# EAGLE board 640 motherboard (EAGLE 6.1)

Size 160 x 117.7 mm. Coordinates in mm from the lower left corner, seen from the top.
Outline: 0,0 160,0 160,117.7 0,117.7 0,0
Outline: 66.65,19.63 109.16,19.63 109.14,66.69 66.62,66.69 66.65,19.63
Copper layers (1*16): Top 0.035mm / dielectric 1.5mm / Bottom 0.035mm
Design rules: minimum track width 10mil, minimum drill 24mil, track to track 8mil, track to pad 8mil, pad to pad 8mil, via to via 8mil, smd to smd 8mil, copper to edge 40mil, drill to drill 8mil, minimum pad ring 10mil, minimum via ring 8mil, stop-mask expansion 4mil, vias tented up to drill 0mil, thermal gap 10mil

## Footprints (pad centres in the part's own frame; a part is rotated, then mirrored left to right if it is on the bottom)
10X10MTA = drill 1.016 long: 1 11.43,0; 2 8.89,0; 3 6.35,0; 4 3.81,0; 5 1.27,0; 6 -1.27,0; 7 -3.81,0; 8 -6.35,0; 9 -8.89,0; 10 -11.43,0
E-050X125 = drill 1.016 pad 2.184: + -2.54,0 | drill 1.016 pad 2.184 octagon: - 2.54,0
C2.5-2 = drill 0.813 pad 1.6 octagon: 1 -1.27,0; 2 1.27,0
DO35-10 = drill 0.813 long: A 5.08,0; C -5.08,0
SFH482 = drill 0.813 long: A -1.27,0; K 1.27,0
TUXGR_16X2_R2 = drill 1 pad 1.676: 1 -32,15.5; 2 -29.46,15.5; 3 -26.92,15.5; 4 -24.38,15.5; 5 -21.84,15.5; 6 -19.3,15.5; 7 -16.76,15.5; 8 -14.22,15.5; 9 -11.68,15.5; 10 -9.14,15.5; 11 -6.6,15.5; 12 -4.06,15.5; 13 -1.52,15.5; 14 1.02,15.5; 15 3.56,15.5; 16 6.1,15.5 | hole 2.5: -37.5,-15.5; 37.5,-15.5; -37.5,15.5; 37.5,15.5
TO3-K02 = drill 1.194 pad 3.81 octagon: 1 -1.778,-5.461; 2 -1.778,5.461 | drill 4.115 pad 6.477: 3 15.113,0; 3@ -15.113,0
1X2MTA = drill 1.676 long: 1 1.981,0; 2 -1.981,0
10X08MTA = drill 1.016 long: 1 8.89,0; 2 6.35,0; 3 3.81,0; 4 1.27,0; 5 -1.27,0; 6 -3.81,0; 7 -6.35,0; 8 -8.89,0
PAK100/2500-10 = drill 1 pad 1.422: 1 -5.08,-1.27; 2 -5.08,1.27; 3 -2.54,-1.27; 4 -2.54,1.27; 5 0,-1.27; 6 0,1.27; 7 2.54,-1.27; 8 2.54,1.27; 9 5.08,-1.27; 10 5.08,1.27
0207/10 = drill 0.813 octagon: 1 -5.08,0; 2 5.08,0
PVA2R = drill 0.813 long: 1 -2.997,2.489; 2 -2.997,0; 3 -2.997,-2.489; 4 2.997,2.489; 5 2.997,0; 6 2.997,-2.489
ML26 = drill 0.914 octagon: 1 -15.24,-1.27; 2 -15.24,1.27; 3 -12.7,-1.27; 4 -12.7,1.27; 5 -10.16,-1.27; 6 -10.16,1.27; 7 -7.62,-1.27; 8 -7.62,1.27; 9 -5.08,-1.27; 10 -5.08,1.27; 11 -2.54,-1.27; 12 -2.54,1.27; 13 0,-1.27; 14 0,1.27; 15 2.54,-1.27; 16 2.54,1.27; 17 5.08,-1.27; 18 5.08,1.27; 19 7.62,-1.27; 20 7.62,1.27; 21 10.16,-1.27; 22 10.16,1.27; 23 12.7,-1.27; 24 12.7,1.27; 25 15.24,-1.27; 26 15.24,1.27

## Placement (x,y rotation side)
ADC1  [10X10MTA]  -26.67,139.7 0 top  (outside the outline)
ADC2  [10X10MTA]  -53.34,139.7 0 top  (outside the outline)
C1  [E-050X125]  32.17,37.53 0 top
C2  [E-050X125]  30.74,13.65 0 top
C3  [C2.5-2]  29.14,108.67 0 top
C4  [C2.5-2]  29.36,104.08 0 top
C5  [C2.5-2]  29.34,99.49 0 top
C6  [C2.5-2]  29.57,94.18 0 top
D1  BAW75  [DO35-10]  15.66,98.79 0 top
D2  1N4446  [DO35-10]  16.36,104.88 0 top
D3  SFH482  [SFH482]  -58.42,129.54 0 top  (outside the outline)
D4  SFH482  [SFH482]  -67.31,129.54 0 top  (outside the outline)
D5  SFH482  [SFH482]  -76.2,129.54 0 top  (outside the outline)
DIS1  TUXGR_16X2_R2  [TUXGR_16X2_R2]  80.75,120.35 180 top
IC1  [TO3-K02]  -93.84,65.51 270 top  (outside the outline)
J1  [1X2MTA]  15.13,14.22 90 top
J2  [10X08MTA]  53.56,31.29 90 top
M2  2510-  [PAK100/2500-10]  122.51,90.66 0 top
M3  2510-  [PAK100/2500-10]  151.03,56.83 270 top
M4  2510-  [PAK100/2500-10]  72.58,77.87 0 top
M5  2510-  [PAK100/2500-10]  -87.63,95.25 0 top  (outside the outline)
M6  2510-  [PAK100/2500-10]  -109.22,95.25 0 top  (outside the outline)
M7  2510-  [PAK100/2500-10]  122.75,78.19 0 top
M8  2510-  [PAK100/2500-10]  96.1,91.23 0 top
M9  2510-  [PAK100/2500-10]  -66.04,106.68 0 top  (outside the outline)
M10  2510-  [PAK100/2500-10]  -87.63,106.68 0 top  (outside the outline)
M11  2510-  [PAK100/2500-10]  -109.22,106.68 0 top  (outside the outline)
M12  2510-  [PAK100/2500-10]  137.7,57.18 270 top
M-1  2510-  [PAK100/2500-10]  124.17,57.06 270 top
PORT-A  2510-  [PAK100/2500-10]  62.71,9.06 180 top
PORT-C  2510-  [PAK100/2500-10]  115.94,9.38 180 top
PORT-D  2510-  [PAK100/2500-10]  123.71,32.95 270 top
PORT-H&B  2510-  [PAK100/2500-10]  96.66,77.79 0 top
PORT-J  2510-  [PAK100/2500-10]  89.84,9.41 180 top
R1  [0207/10]  16.14,110.1 0 top
R2  [0207/10]  -19.05,143.51 0 top  (outside the outline)
R3  [0207/10]  -31.75,143.51 0 top  (outside the outline)
S1  PVA2R  [PVA2R]  14.37,34.17 90 top
SV1  [ML26]  88.03,62.47 0 top
SV2  [ML26]  104.6,43.01 270 top
SV3  [ML26]  88.01,24.13 180 top
SV4  [ML26]  71.54,43.13 90 top

## Library data of the parts
ADC1 ADC2 J1 J2 = con-amp
C1 C2 = cap-master
C3-C6 = capacitor-wima
D1 D2 = diode
D3-D5 = led
DIS1 = display-lcd
IC1 = v-reg
M2-M12 M-1 PORT-A PORT-C PORT-D PORT-H&B PORT-J = con-3m
R1-R3 = resistor
S1 = switch-misc
SV1-SV4 = con-harting-ml

## Nets
+5V: ADC1.1 C2.+ C3.1 C4.1 C5.1 C6.1 D1.C DIS1.2 DIS1.15 IC1.1 M2.1 M2.2 M3.1 M3.2 M4.1 M4.2 M5.1 M5.2 M6.1 M6.2 M7.1 M7.2 M8.1 M8.2 M9.1 M9.2 M10.1 M10.2 M11.1 M11.2 M12.1 M12.2 M-1.1 M-1.2 PORT-A.10 PORT-C.10 PORT-D.10 PORT-H&B.10 PORT-J.10 R1.2 R2.2 SV1.9 SV2.5 SV3.12 SV4.6 SV4.26
GND: ADC1.2 C1.- C2.- C3.2 C4.2 C5.2 C6.2 D1.A D2.A D3.K D5.K DIS1.1 DIS1.3 DIS1.5 DIS1.7 DIS1.8 DIS1.9 DIS1.10 DIS1.16 IC1.3 M2.3 M2.4 M3.3 M3.4 M4.3 M4.4 M5.3 M5.4 M6.3 M6.4 M7.3 M7.4 M8.3 M8.4 M9.3 M9.4 M10.3 M10.4 M11.3 M11.4 M12.3 M12.4 M-1.3 M-1.4 PORT-A.9 PORT-C.9 PORT-D.9 PORT-H&B.9 PORT-J.9 SV1.12 SV2.8 SV3.11 SV4.5 SV4.23
N$1: C1.+ IC1.2 S1.3
N$2: D2.C J1.1
N$3: PORT-C.1 SV3.4
N$4: M2.5 M2.6 SV1.5
N$5: M3.5 M3.6 SV1.8
N$6: M4.5 M4.6 SV1.16
N$7: M5.5 M5.6 SV1.15
N$8: M6.5 M6.6 SV1.18
N$9: M12.5 M12.6 SV2.16
N$10: PORT-C.2 SV3.3
N$11: M10.5 M10.6 SV2.14
N$12: M9.5 M9.6 SV2.2
N$13: M8.5 M8.6 SV1.26
N$14: M7.5 M7.6 SV1.23
N$15: ADC1.4 SV4.21
N$16: ADC1.5 SV4.22
N$17: ADC1.3 SV4.24
N$18: ADC1.6 SV4.19
N$19: ADC1.7 SV4.20
N$20: ADC1.8 SV4.17
N$21: ADC1.9 SV4.18
N$22: ADC1.10 SV4.15
N$23: ADC2.1 SV4.16
N$24: ADC2.2 SV4.13
N$25: ADC2.3 SV4.14
N$26: ADC2.4 SV4.11
N$27: ADC2.5 SV4.12
N$28: ADC2.7 SV4.10
N$29: ADC2.6 SV4.9
N$30: ADC2.9 SV4.8
N$31: M-1.5 M-1.6 SV1.6
N$32: M11.5 M11.6 SV2.13
N$33: PORT-C.3 SV3.6
N$34: PORT-C.4 SV3.5
N$35: PORT-C.5 SV3.8
N$36: PORT-C.6 SV3.7
N$37: PORT-C.7 SV3.10
N$38: PORT-C.8 SV3.9
N$39: PORT-J.1 SV3.14
N$40: PORT-J.2 SV3.13
N$41: PORT-J.3 SV3.16
N$42: PORT-J.4 SV3.15
N$43: PORT-J.5 SV3.18
N$44: PORT-J.6 SV3.17
N$45: PORT-J.7 SV3.20
N$46: PORT-J.8 SV4.3
N$47: ADC2.8 SV4.7
N$48: J2.1 PORT-A.1 SV4.4
N$49: J2.2 PORT-A.2 SV4.1
N$50: J2.3 PORT-A.3 SV4.2
N$51: J2.4 PORT-A.4 SV3.26
N$53: J2.5 PORT-A.5 SV3.23
N$54: J2.7 PORT-A.7 SV3.21
N$55: J2.8 PORT-A.8 SV3.22
N$56: PORT-D.8 SV2.26
N$57: PORT-D.7 SV2.23
N$58: PORT-D.6 SV2.24
N$59: PORT-D.5 SV2.21
N$60: PORT-D.2 SV2.20
N$61: PORT-D.3 SV2.19
N$62: PORT-D.4 SV2.22
N$63: PORT-D.1 SV2.17
N$64: D3.A R1.1
N$65: J1.2 S1.2
N$66: DIS1.11 SV1.4
N$67: DIS1.12 SV1.3
N$68: DIS1.13 SV1.7
N$69: DIS1.14 SV1.10
N$70: DIS1.4 SV1.2
N$71: DIS1.6 SV1.1
N$72: PORT-H&B.1 SV1.11
N$73: M2.7 M2.8 SV2.1
N$74: PORT-H&B.2 SV1.14
N$75: PORT-H&B.3 SV1.13
N$76: PORT-H&B.4 SV1.20
N$77: M3.7 M3.8 SV2.4
N$78: PORT-H&B.5 SV1.19
N$79: M-1.7 M-1.8 SV1.17
N$80: M5.7 M5.8 SV2.9
N$81: M4.7 M4.8 SV2.3
N$82: PORT-H&B.6 R3.2 SV1.22
N$83: PORT-H&B.7 SV1.21
N$84: M7.7 M7.8 SV2.11
N$85: M6.7 M6.8 SV2.12
N$86: PORT-H&B.8 SV1.24
N$87: D4.A R2.1
N$88: M9.7 M9.8 SV2.18
N$89: M8.7 M8.8 SV2.15
N$90: M11.7 M11.8 SV3.1
N$91: D4.K SV2.6
N$92: M10.7 M10.8 SV3.2
N$97: M12.7 M12.8 SV3.19
N$100: J2.6 PORT-A.6 SV3.24
N$104: D5.A R3.1

## Tracks (layer width: path | path; a pad name or v marks a point on that pad's centre or on a via)
+5V  (45 unrouted)
GND  (53 unrouted)
N$1  (2 unrouted)
N$2  (1 unrouted)
N$3  (1 unrouted)
N$4  (2 unrouted)
N$5  (2 unrouted)
N$6  (2 unrouted)
N$7  (2 unrouted)
N$8  (2 unrouted)
N$9  (2 unrouted)
N$10  (1 unrouted)
N$11  (2 unrouted)
N$12  (2 unrouted)
N$13  (2 unrouted)
N$14  (2 unrouted)
N$15  (1 unrouted)
N$16  (1 unrouted)
N$17  (1 unrouted)
N$18  (1 unrouted)
N$19  (1 unrouted)
N$20  (1 unrouted)
N$21  (1 unrouted)
N$22  (1 unrouted)
N$23  (1 unrouted)
N$24  (1 unrouted)
N$25  (1 unrouted)
N$26  (1 unrouted)
N$27  (1 unrouted)
N$28  (1 unrouted)
N$29  (1 unrouted)
N$30  (1 unrouted)
N$31  (2 unrouted)
N$32  (2 unrouted)
N$33  (1 unrouted)
N$34  (1 unrouted)
N$35  (1 unrouted)
N$36  (1 unrouted)
N$37  (1 unrouted)
N$38  (1 unrouted)
N$39  (1 unrouted)
N$40  (1 unrouted)
N$41  (1 unrouted)
N$42  (1 unrouted)
N$43  (1 unrouted)
N$44  (1 unrouted)
N$45  (1 unrouted)
N$46  (1 unrouted)
N$47  (1 unrouted)
N$48  (2 unrouted)
N$49  (2 unrouted)
N$50  (2 unrouted)
N$51  (2 unrouted)
N$53  (2 unrouted)
N$54  (2 unrouted)
N$55  (2 unrouted)
N$56  (1 unrouted)
N$57  (1 unrouted)
N$58  (1 unrouted)
N$59  (1 unrouted)
N$60  (1 unrouted)
N$61  (1 unrouted)
N$62  (1 unrouted)
N$63  (1 unrouted)
N$64  (1 unrouted)
N$65  (1 unrouted)
N$66  (1 unrouted)
N$67  (1 unrouted)
N$68  (1 unrouted)
N$69  (1 unrouted)
N$70  (1 unrouted)
N$71  (1 unrouted)
N$72  (1 unrouted)
N$73  (2 unrouted)
N$74  (1 unrouted)
N$75  (1 unrouted)
N$76  (1 unrouted)
N$77  (2 unrouted)
N$78  (1 unrouted)
N$79  (2 unrouted)
N$80  (2 unrouted)
N$81  (2 unrouted)
N$82  (2 unrouted)
N$83  (1 unrouted)
N$84  (2 unrouted)
N$85  (2 unrouted)
N$86  (1 unrouted)
N$87  (1 unrouted)
N$88  (2 unrouted)
N$89  (2 unrouted)
N$90  (2 unrouted)
N$91  (1 unrouted)
N$92  (2 unrouted)
N$97  (2 unrouted)
N$100  (2 unrouted)
N$104  (1 unrouted)